# EAGLE board EHDD_LAB_4v2 (EAGLE 7.7.0)
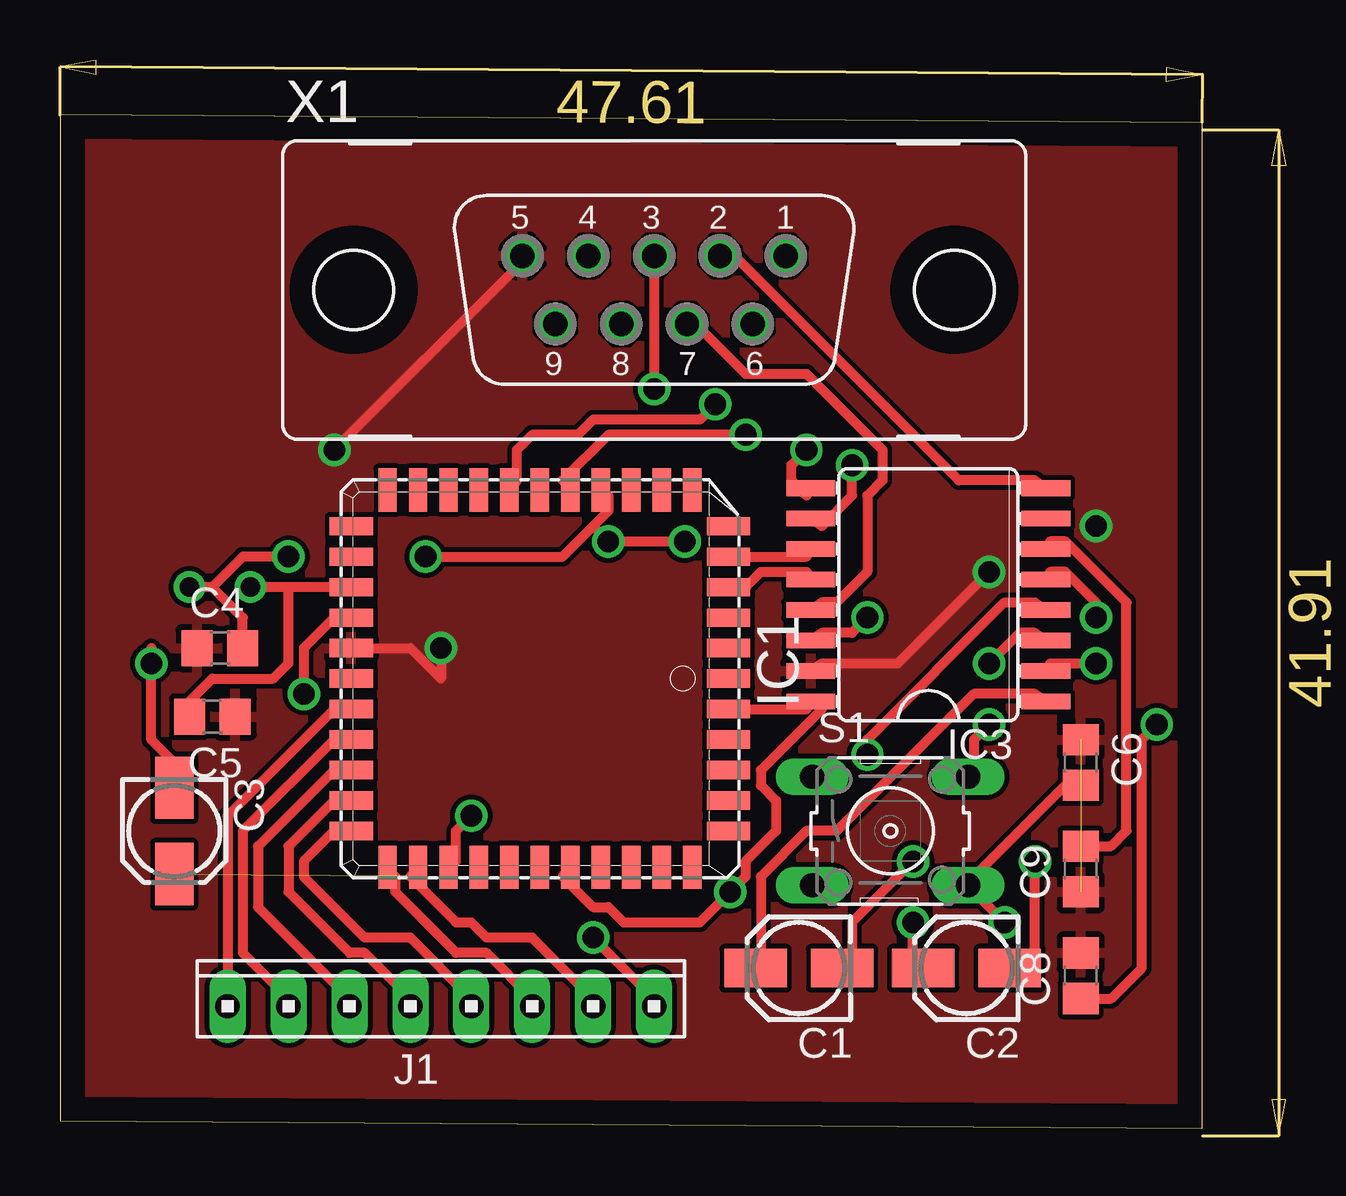
[diagram p0: board, top side]
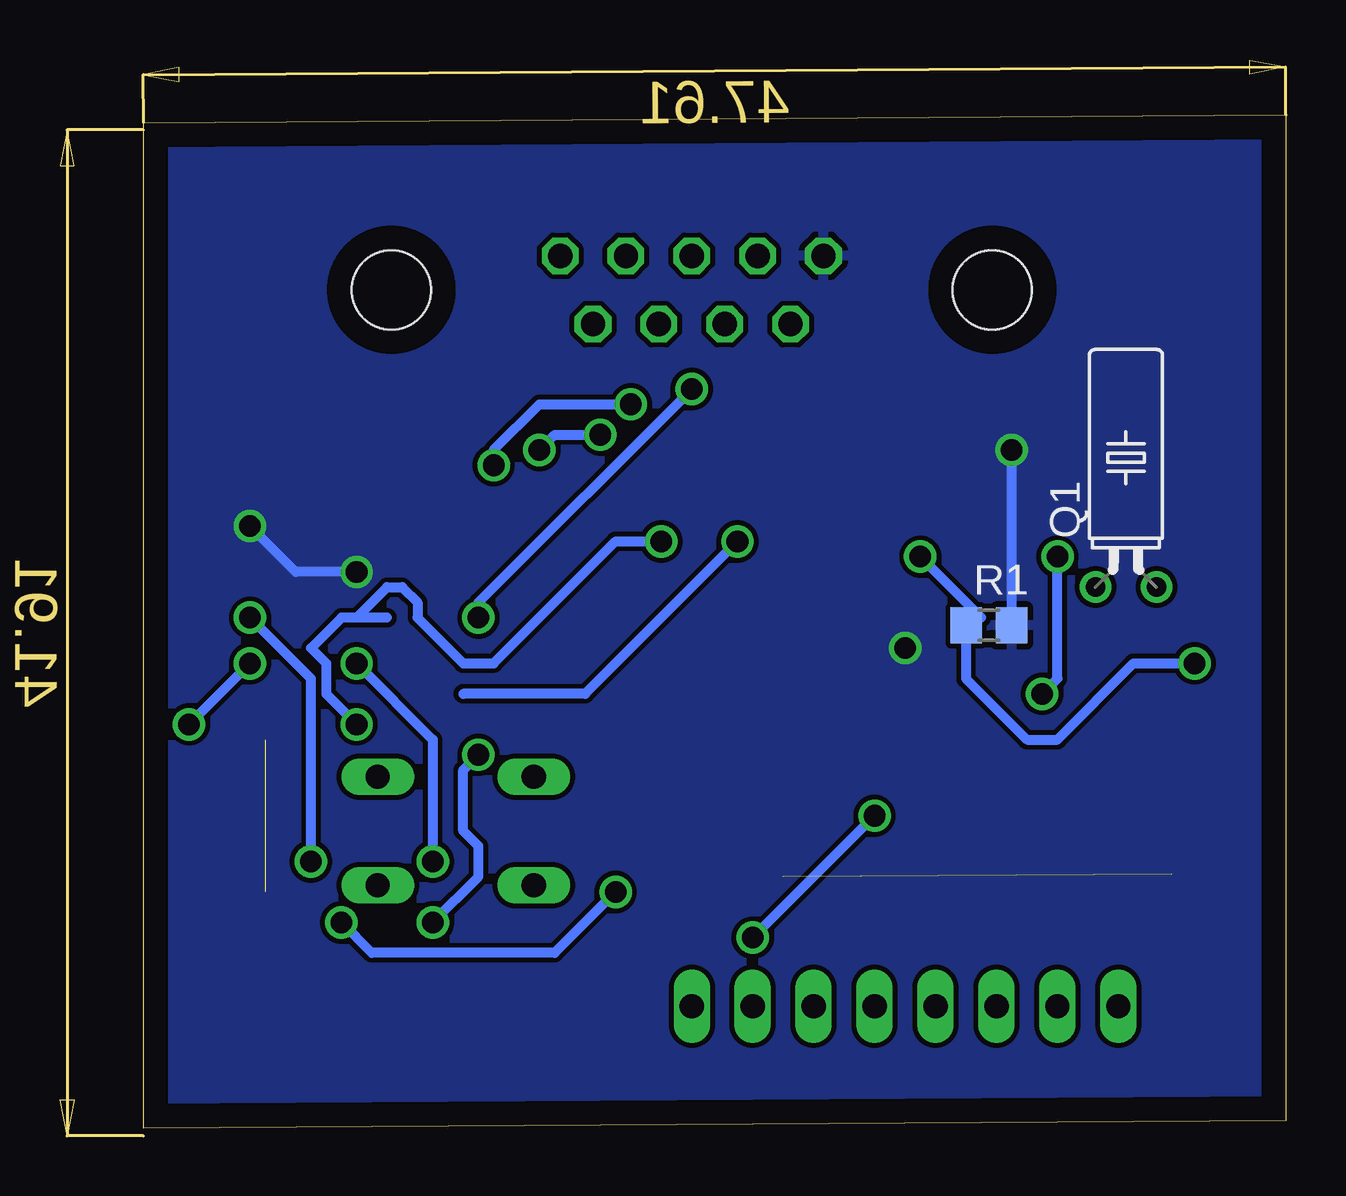
[diagram p1: board, bottom side, seen from below]

Size 47.61 x 42.22 mm. Coordinates in mm from the lower left corner, seen from the top.
Outline: 0,0.32 47.61,0 47.61,41.9 0,42.22 0,0.32
Copper layers (1*16): Top 0.035mm / dielectric 1.5mm / Bottom 0.035mm
Design rules "default": minimum track width 10mil, minimum drill 24mil, track to track 8mil, track to pad 8mil, pad to pad 8mil, via to via 8mil, smd to smd 8mil, copper to edge 40mil, drill to drill 8mil, minimum pad ring 10mil, minimum via ring 8mil, stop-mask expansion 4mil, vias tented up to drill 0mil, thermal gap 10mil

## Footprints (pad centres in the part's own frame; a part is rotated, then mirrored left to right if it is on the bottom)
153CLV-0405 = smd 2.6 x 1.6: + 1.8,0; - -1.8,0
C0805 = smd 1.3 x 1.5: 1 -0.95,0; 2 0.95,0
PLCC44 = smd 1.8 x 0.76: 1 -7.86,0; 2 -7.86,-1.27; 3 -7.86,-2.54; 4 -7.86,-3.81; 5 -7.86,-5.08; 6 -7.86,-6.35; 18 7.86,-6.35; 19 7.86,-5.08; 20 7.86,-3.81; 21 7.86,-2.54; 22 7.86,-1.27; 23 7.86,0; 24 7.86,1.27; 25 7.86,2.54; 26 7.86,3.81; 27 7.86,5.08; 28 7.86,6.35; 40 -7.86,6.35; 41 -7.86,5.08; 42 -7.86,3.81; 43 -7.86,2.54; 44 -7.86,1.27 | smd 0.76 x 1.8: 7 -6.35,-7.86; 8 -5.08,-7.86; 9 -3.81,-7.86; 10 -2.54,-7.86; 11 -1.27,-7.86; 12 0,-7.86; 13 1.27,-7.86; 14 2.54,-7.86; 15 3.81,-7.86; 16 5.08,-7.86; 17 6.35,-7.86; 29 6.35,7.86; 30 5.08,7.86; 31 3.81,7.86; 32 2.54,7.86; 33 1.27,7.86; 34 0,7.86; 35 -1.27,7.86; 36 -2.54,7.86; 37 -3.81,7.86; 38 -5.08,7.86; 39 -6.35,7.86
SO16L = smd 0.66 x 2.032: 1 -4.445,-4.902; 2 -3.175,-4.902; 3 -1.905,-4.902; 4 -0.635,-4.902; 5 0.635,-4.902; 6 1.905,-4.902; 7 3.175,-4.902; 8 4.445,-4.902; 9 4.445,4.902; 10 3.175,4.902; 11 1.905,4.902; 12 0.635,4.902; 13 -0.635,4.902; 14 -1.905,4.902; 15 -3.175,4.902; 16 -4.445,4.902
10X08MTA = drill 1.016 long: 1 8.89,0; 2 6.35,0; 3 3.81,0; 4 1.27,0; 5 -1.27,0; 6 -3.81,0; 7 -6.35,0; 8 -8.89,0
TC38H = drill 0.813: 1 -1.27,0; 2 1.27,0
R0805 = smd 1.3 x 1.5: 1 -0.95,0; 2 0.95,0
B3F-10XX = drill 1.016 long: 1 -3.251,2.261; 2 3.251,2.261; 3 -3.251,-2.261; 4 3.251,-2.261
F09V = drill 1.016 octagon: 1 5.486,1.422; 2 2.743,1.422; 3 0,1.422; 4 -2.743,1.422; 5 -5.486,1.422; 6 4.115,-1.422; 7 1.372,-1.422; 8 -1.372,-1.422; 9 -4.115,-1.422 | hole 3.302: -12.522,0; 12.522,0

## Placement (x,y rotation side)
C1  10uF  [153CLV-0405]  30.8,6.67 180 top
C2  10uF  [153CLV-0405]  37.78,6.67 180 top
C3  10uF/10v  [153CLV-0405]  4.76,12.38 270 top
C4  33pF  [C0805]  6.67,20 0 top
C5  33pF  [C0805]  6.35,17.15 180 top
C6  100nF  [C0805]  42.55,15.24 270 top
C8  10uF  [C0805]  42.55,6.35 90 top
C9  10uF  [C0805]  42.55,10.8 90 top
IC1  AT89S51-24J  [PLCC44]  20,18.73 180 top
IC3  MAX232ECWE  [SO16L]  36.2,22.23 90 top
J1  [10X08MTA]  15.88,5.08 0 top
Q1  11.0592MHz  [TC38H]  6.67,22.54 0 bottom
R1  8.2K  [R0805]  12.38,20.96 0 bottom
S1  [B3F-10XX]  34.61,12.38 0 top
X1  [F09V]  24.77,34.93 0 top

## Library data of the parts
C1-C6 C8 C9 R1 = rcl
IC1 = atmel; MPN: AT89S51-24JU; OC_FARNELL: 1095738; OC_NEWARK: 96K6577
IC3 = maxim; MF: MAXIM; MPN: MAX232ECWE+; OC_FARNELL: 9724435; OC_NEWARK: 67K4440
J1 = con-amp
Q1 = crystal; OC_FARNELL: unknown; OC_NEWARK: unknown
S1 = switch-omron; MPN: B3F-1000; OC_FARNELL: 176432; OC_NEWARK: 36M3542
X1 = con-subd; OC_FARNELL: unknown; OC_NEWARK: unknown

## Nets
GND: C4.1 C5.1 C6.1 C8.2 C9.1 IC1.22 IC3.15 R1.2 X1.5
N$1: IC1.5 IC3.11
N$2: IC1.13 IC3.10
N$3: IC1.4 IC3.12
N$4: IC1.11 IC3.9
N$5: C2.- IC3.5
N$6: C2.+ IC3.4
N$7: C1.- IC3.3
N$8: C1.+ IC3.1
N$9: C9.2 IC3.6
N$10: C8.1 IC3.2
N$12: IC3.14 X1.3
N$13: IC3.8 X1.2
N$14: IC3.13 X1.7
N$16: IC1.24 J1.8
N$17: IC1.25 J1.7
N$18: IC1.26 J1.6
N$19: IC1.27 J1.5
N$20: IC1.28 J1.4
N$21: IC1.29 J1.3
N$22: IC1.30 J1.2
N$23: IC1.31 J1.1
N$24: C5.2 IC1.20 Q1.1
N$25: C4.2 IC1.21 Q1.2
N$27: C3.- IC1.10 R1.1 S1.2
VCC: C3.+ C6.2 IC1.35 IC1.44 IC3.16 S1.4

## Tracks (layer width: path | path; a pad name or v marks a point on that pad's centre or on a via)
GND  (via drill 0.9)  (1 unrouted)
  Top 0.406: v11.43,28.26 19.05,35.88 X1.5 | v38.73,23.18 34.92,19.37 31.75,19.37 IC3.15 | IC1.22 14.61,20 15.88,18.73 v15.88,20
  Bottom 0.406: v11.43,28.26 11.43,21.27 R1.2 | v43.18,25.08 41.27,23.18 v38.73,23.18
  pour Top: 0,42.23 0,0.32 47.62,-0.32 47.62,41.59
  pour Bottom: 0,42.23 47.62,41.59 47.62,-0.32 0,0.32
N$1
  Top 0.406: IC1.5 31.11,23.81 IC3.11
N$2  (via drill 0.9)
  Top 0.406: IC1.13 19.05,26.99 19.05,28.26 19.68,28.89 21.59,28.89 22.23,29.53 26.67,29.53 v27.3,30.16 | v33.02,27.62 33.02,26.35 31.75,25.08 IC3.10
  Bottom 0.406: v27.3,30.16 31.11,30.16 33.02,28.26 v33.02,27.62
N$3
  Top 0.406: IC1.4 28.57,22.54 29.21,23.18 31.11,23.18 IC3.12
N$4  (via drill 0.9)
  Top 0.406: IC1.11 20.95,26.99 22.86,28.89 v28.57,28.89 | v31.11,28.26 30.48,27.62 30.48,26.99 31.11,26.35 IC3.9
  Bottom 0.406: v28.57,28.89 30.48,28.89 v31.11,28.26
N$5  (via drill 0.9)
  Top 0.406: v43.18,21.27 43.18,21.91 41.91,23.18 41.27,23.18 IC3.5 | v40.64,11.11 40.64,6.67 C2.-
  Bottom 0.406: v43.18,21.27 40.64,18.73 v40.64,11.11
N$6  (via drill 0.9)
  Top 0.406: v33.66,15.56 33.66,16.19 39.37,21.91 40.64,21.91 IC3.4 | v35.56,8.57 35.56,6.67 C2.+
  Bottom 0.406: v33.66,15.56 34.29,14.92 34.29,12.38 33.66,11.75 33.66,10.48 v35.56,8.57
N$7  (via drill 0.9)
  Top 0.406: v35.56,11.11 33.02,8.57 33.02,6.67 C1.- | v38.73,19.37 40.01,20.64 40.64,20.64 IC3.3
  Bottom 0.406: v35.56,11.11 35.56,16.19 v38.73,19.37
N$8
  Top 0.406: C1.+ 29.21,6.67 29.21,10.48 31.11,12.38 32.38,12.38 38.1,18.1 40.64,18.1 IC3.1
N$9
  Top 0.406: IC3.6 41.27,24.45 41.91,24.45 44.45,21.91 44.45,12.38 43.81,11.75 C9.2
N$10  (via drill 0.9)
  Top 0.406: v45.72,16.83 45.09,16.19 45.09,6.67 43.81,5.4 C8.1 | v43.18,19.37 41.27,19.37 IC3.2
  Bottom 0.406: v45.72,16.83 v43.18,19.37
N$12  (via drill 0.9)
  Top 0.406: v33.66,21.27 33.02,20.64 31.75,20.64 IC3.14 | X1.3 v24.77,30.8
  Bottom 0.406: v33.66,21.27 33.66,21.91 v24.77,30.8
N$13
  Top 0.406: X1.2 27.94,36.51 37.47,26.99 40.64,26.99 IC3.8
N$14
  Top 0.406: IC3.13 31.75,21.91 32.38,21.91 33.66,23.18 33.66,26.35 34.29,26.99 34.29,28.26 31.11,31.43 28.57,31.43 26.67,33.34 X1.7
N$16
  Top 0.406: J1.8 6.99,13.02 11.43,17.46 IC1.24
N$17
  Top 0.406: IC1.25 11.43,16.19 7.62,12.38 7.62,7.3 9.53,5.4 J1.7
N$18
  Top 0.406: IC1.26 11.43,14.92 8.26,11.75 8.26,9.21 12.06,5.4 J1.6
N$19
  Top 0.406: J1.5 14.61,5.4 12.7,7.3 12.06,7.3 9.53,9.84 9.53,11.75 11.43,13.65 IC1.27
N$20
  Top 0.406: J1.4 17.14,5.4 14.61,7.94 12.7,7.94 10.16,10.48 10.16,11.11 11.43,12.38 IC1.28
N$21
  Top 0.406: J1.3 19.68,5.4 17.78,7.3 16.51,7.3 13.97,9.84 13.97,10.48 IC1.29
N$22
  Top 0.406: J1.2 22.23,5.4 19.68,7.94 17.78,7.94 17.14,8.57 16.51,8.57 14.61,10.48 IC1.30
N$23  (via drill 0.9)
  Top 0.406: IC1.31 16.51,11.11 16.51,12.38 v17.14,13.02 | v22.23,7.94 24.77,5.4 J1.1
  Bottom 0.406: v22.23,7.94 v17.14,13.02
N$24
  Top 0.406: IC1.20 9.53,22.54 | 9.53,22.54 Q1.1 | 9.53,22.54 9.53,19.37 8.89,18.73 6.35,18.73 5.08,17.46 C5.2
N$25  (via drill 0.9)
  Top 0.406: 6.35,22.54 Q1.2 | 6.35,22.54 7.62,21.27 C4.2 | 6.35,22.54 7.62,23.81 v9.53,23.81 | v10.16,18.1 10.16,20 11.43,21.27 IC1.21
  Bottom 0.406: v9.53,23.81 9.53,18.73 v10.16,18.1
N$27  (via drill 0.9)
  Top 0.406: 22.23,25.08 22.86,25.72 22.86,26.35 IC1.10 | 22.23,25.08 20.95,23.81 v15.24,23.81 | v38.73,16.83 38.1,16.19 38.1,14.92 S1.2 | 22.23,25.08 v22.86,24.45 v26.04,24.45 | C3.- 5.08,14.29 5.08,14.92 3.81,16.19 v3.81,19.37 3.81,20
  Bottom 0.406: v15.24,23.81 12.7,21.27 R1.1 13.34,20.64 13.34,18.73 10.79,16.19 9.53,16.19 6.35,19.37 v3.81,19.37 | v38.73,16.83 40.01,18.1 40.01,19.37 40.64,20 39.37,21.27 38.73,21.27 | 37.47,21.27 38.73,21.27 | 34.29,18.1 29.21,18.1 v22.86,24.45 | v26.04,24.45 27.94,24.45 33.02,19.37 34.29,19.37 36.2,21.27 36.2,21.91 36.83,22.54 37.47,22.54 38.73,21.27
VCC  (via drill 0.9)  (1 unrouted)
  Top 0.406: C6.2 41.91,14.29 38.1,10.48 S1.4 38.1,9.84 v39.37,8.57 | IC1.44 31.11,17.46 IC3.16 31.75,17.46 29.21,14.92 29.21,14.29 29.84,13.65 29.84,12.38 28.57,11.11 28.57,10.48 v27.94,9.84 26.67,8.57 23.5,8.57 22.86,9.21 22.23,9.21 20.95,10.48 IC1.35
  Bottom 0.406: v39.37,8.57 38.1,7.3 30.48,7.3 v27.94,9.84